# EAGLE board Bidirectional-Logic-Converter (EAGLE 6.1)
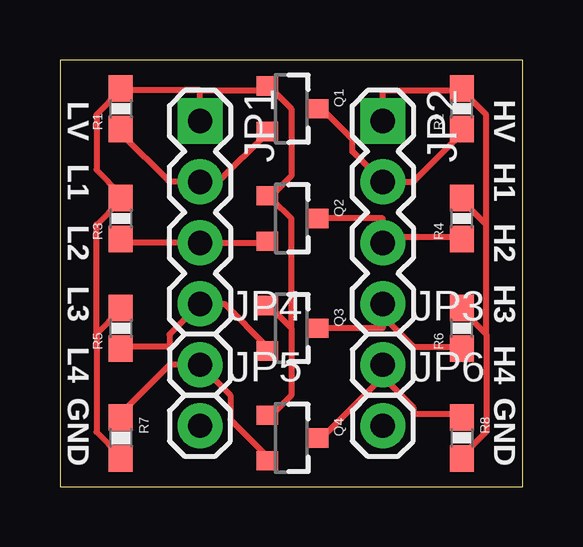
[diagram p0: board, top side]
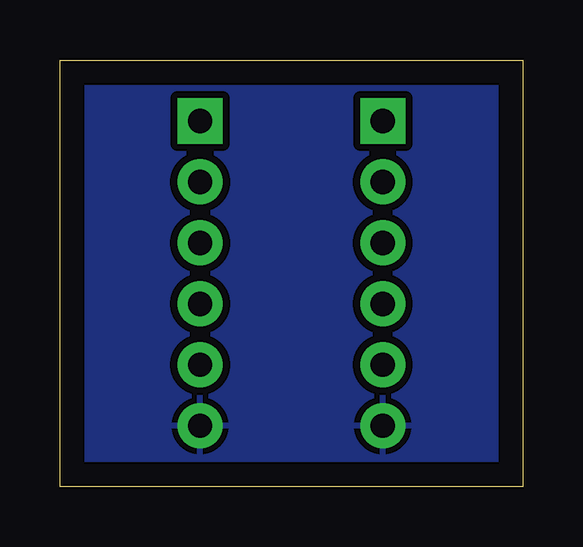
[diagram p1: board, bottom side, seen from below]

Size 19.3 x 17.78 mm. Coordinates in mm from the lower left corner, seen from the top.
Outline: 0,0 19.3,0 19.3,17.78 0,17.78 0,0
Copper layers (1*16): Top 0.035mm / dielectric 1.5mm / Bottom 0.035mm
Design rules: minimum track width 10mil, minimum drill 24mil, track to track 8mil, track to pad 8mil, pad to pad 8mil, via to via 8mil, smd to smd 8mil, copper to edge 40mil, drill to drill 8mil, minimum pad ring 10mil, minimum via ring 8mil, stop-mask expansion 4mil, vias tented up to drill 0mil, thermal gap 10mil

## Footprints (pad centres in the part's own frame; a part is rotated, then mirrored left to right if it is on the bottom)
1X04 = drill 1.016 pad 1.88 square: 1 0,0 | drill 1.016 pad 1.88: 2 2.54,0; 3 5.08,0; 4 7.62,0
1X01 = drill 1.016 pad 1.88: 1 0,0
SOT23-3 = smd 0.8 x 0.9: 1 -0.95,-1; 2 0.95,-1; 3 0,1.1
0603-RES = smd 1.1 x 1: 1 -0.85,0; 2 0.85,0

## Placement (x,y rotation side)
JP1  [1X04]  5.84,15.24 270 top
JP2  [1X04]  13.46,15.24 270 top
JP3  M01PTH  [1X01]  13.46,5.08 0 top
JP4  M01PTH  [1X01]  5.84,5.08 0 top
JP5  M01PTH  [1X01]  5.84,2.54 0 top
JP6  M01PTH  [1X01]  13.46,2.54 0 top
Q1  BSS138N  [SOT23-3]  9.65,15.75 270 top
Q2  BSS138N  [SOT23-3]  9.65,11.18 270 top
Q3  BSS138N  [SOT23-3]  9.65,6.6 270 top
Q4  BSS138N  [SOT23-3]  9.65,2.03 270 top
R1  10K  [0603-RES]  2.54,15.75 90 top
R2  10K  [0603-RES]  16.76,15.75 90 top
R3  10K  [0603-RES]  2.54,11.18 90 top
R4  10K  [0603-RES]  16.76,11.18 90 top
R5  10K  [0603-RES]  2.54,6.6 90 top
R6  10K  [0603-RES]  16.76,6.6 90 top
R7  10K  [0603-RES]  2.54,2.03 270 top
R8  10K  [0603-RES]  16.76,2.03 270 top

## Library data of the parts
JP1-JP6 = SparkFun-Connectors
Q1-Q4 = SparkFun-DiscreteSemi
R1-R8 = SparkFun-Passives

## Nets
3.3V: JP1.1 Q1.1 Q2.1 Q3.1 Q4.1 R1.2 R3.2 R5.2 R7.2
5V: JP2.1 R2.2 R4.2 R6.2 R8.2
GND: JP5.1 JP6.1
HV1: JP2.2 Q1.3 R2.1
HV2: JP2.3 Q2.3 R4.1
HV3: JP2.4 Q3.3 R6.1
HV4: JP3.1 Q4.3 R8.1
LV1: JP1.2 Q1.2 R1.1
LV2: JP1.3 Q2.2 R3.1
LV3: JP1.4 Q3.2 R5.1
LV4: JP4.1 Q4.2 R7.1

## Tracks (layer width: path | path; a pad name or v marks a point on that pad's centre or on a via)
3.3V
  Top 0.254: 1.52,6.35 1.52,2.29 2.54,1.27 R7.2 | 1.52,6.35 2.54,7.37 R5.2 | 1.52,6.35 1.52,10.92 2.54,11.94 R3.2 2.54,12.19 1.52,13.21 1.52,15.49 2.54,16.51 | 9.65,6.6 9.65,3.81 8.89,3.05 Q4.1 | 9.65,6.6 8.89,7.37 Q3.1 | 9.65,6.6 9.65,11.18 8.89,11.94 Q2.1 8.89,12.19 9.65,12.95 9.65,15.75 8.89,16.51 Q1.1 8.64,16.51 5.84,16.51 | JP1.1 5.84,16.51 | 5.84,16.51 2.54,16.51 | 2.54,16.51 R1.2
5V
  Top 0.254: 16.76,16.51 13.46,16.51 JP2.1 | 17.78,6.35 17.78,2.29 16.76,1.27 R8.2 | 17.78,6.35 16.76,7.37 R6.2 | 17.78,10.92 16.76,11.94 R4.2 | 17.78,6.35 17.78,10.92 | 16.76,16.51 17.78,15.49 17.78,10.92 | 16.76,16.51 R2.2
GND
  pour Bottom (isolate 0.305): 0,17.83 19.25,17.83 19.25,0 0,0
HV1
  Top 0.254: Q1.3 10.92,15.75 12.19,14.48 12.19,13.97 JP2.2 14.73,12.7 16.76,14.73 R2.1
HV2
  Top 0.254: Q2.3 13.46,11.18 13.46,10.41 | 13.46,10.41 16.76,10.41 R4.1 | 13.46,10.41 JP2.3
HV3
  Top 0.254: Q3.3 13.46,6.6 13.46,7.11 | 13.46,7.11 14.73,5.84 16.76,5.84 R6.1 | 13.46,7.11 JP2.4
HV4
  Top 0.254: 13.46,4.57 10.92,2.03 Q4.3 | 13.46,4.57 14.73,3.3 14.73,3.05 16.76,3.05 R8.1 | 13.46,4.57 JP3.1
LV1
  Top 0.254: Q1.2 8.64,14.73 6.6,12.7 JP1.2 4.57,12.7 2.54,14.73 R1.1
LV2
  Top 0.254: Q2.2 8.64,10.16 JP1.3 2.54,10.16 R3.1
LV3
  Top 0.254: Q3.2 8.64,5.84 6.86,7.62 JP1.4 4.57,6.35 4.57,5.84 2.54,5.84 R5.1
LV4
  Top 0.254: Q4.2 8.64,1.27 7.11,2.79 7.11,3.81 JP4.1 4.57,5.08 2.54,3.05 R7.1

## Text on the board
_tsilk: LV | HV | L1 | H1 | L2 | H2 | L3 | H3 | L4 | H4 | GND | GND
_bsilk: source | hardware | Bidirectional | open | Logic Level Converter | Explore Labs